# Altium PCB 20150517-F103CONTROL-dcmotor.PcbDoc
Units mil, origin at the board's own origin, x right, y up, seen from the top; angles counter-clockwise.
Board outline 5200 x 3850 mil, 2 copper layers (Top Layer, Bottom Layer); 40 components, 118 nets, 357 pads, 15 vias.
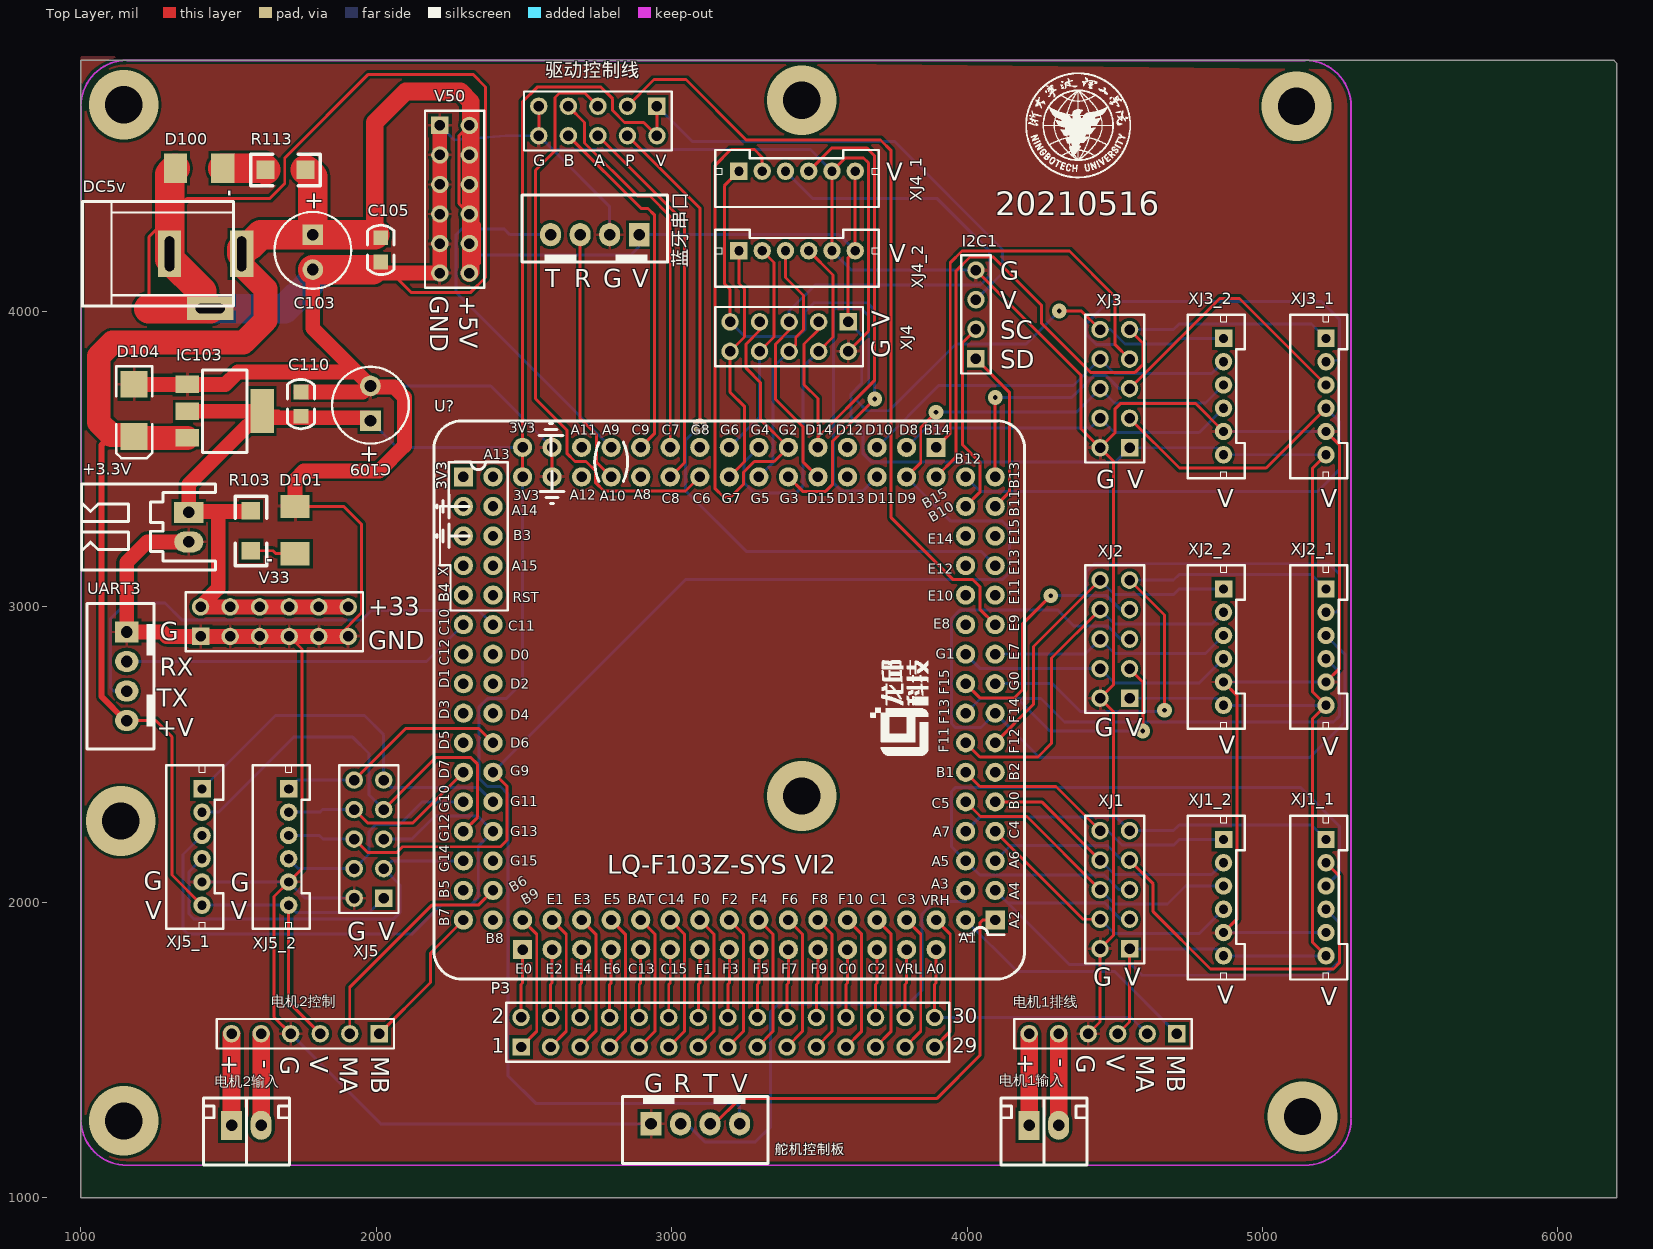
[diagram p0: Top Layer view]
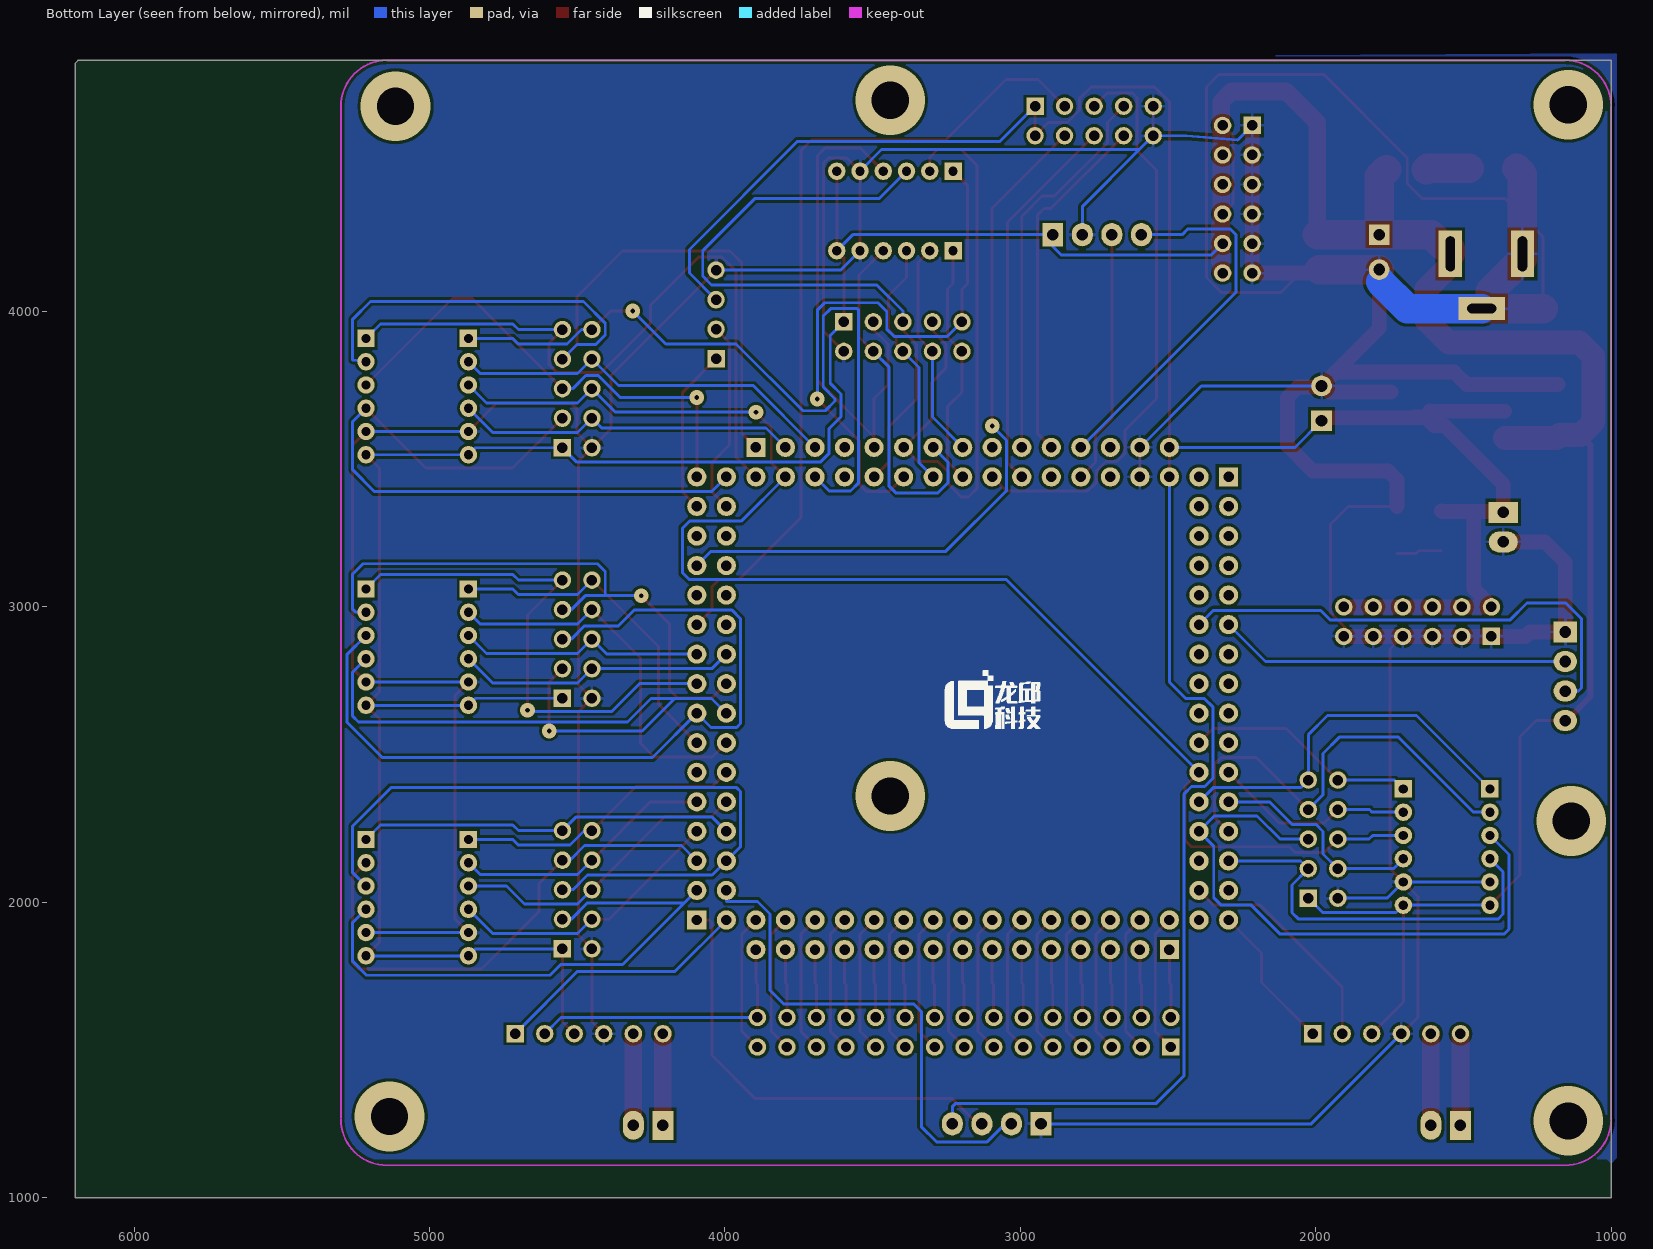
[diagram p1: Bottom Layer view, seen from below]
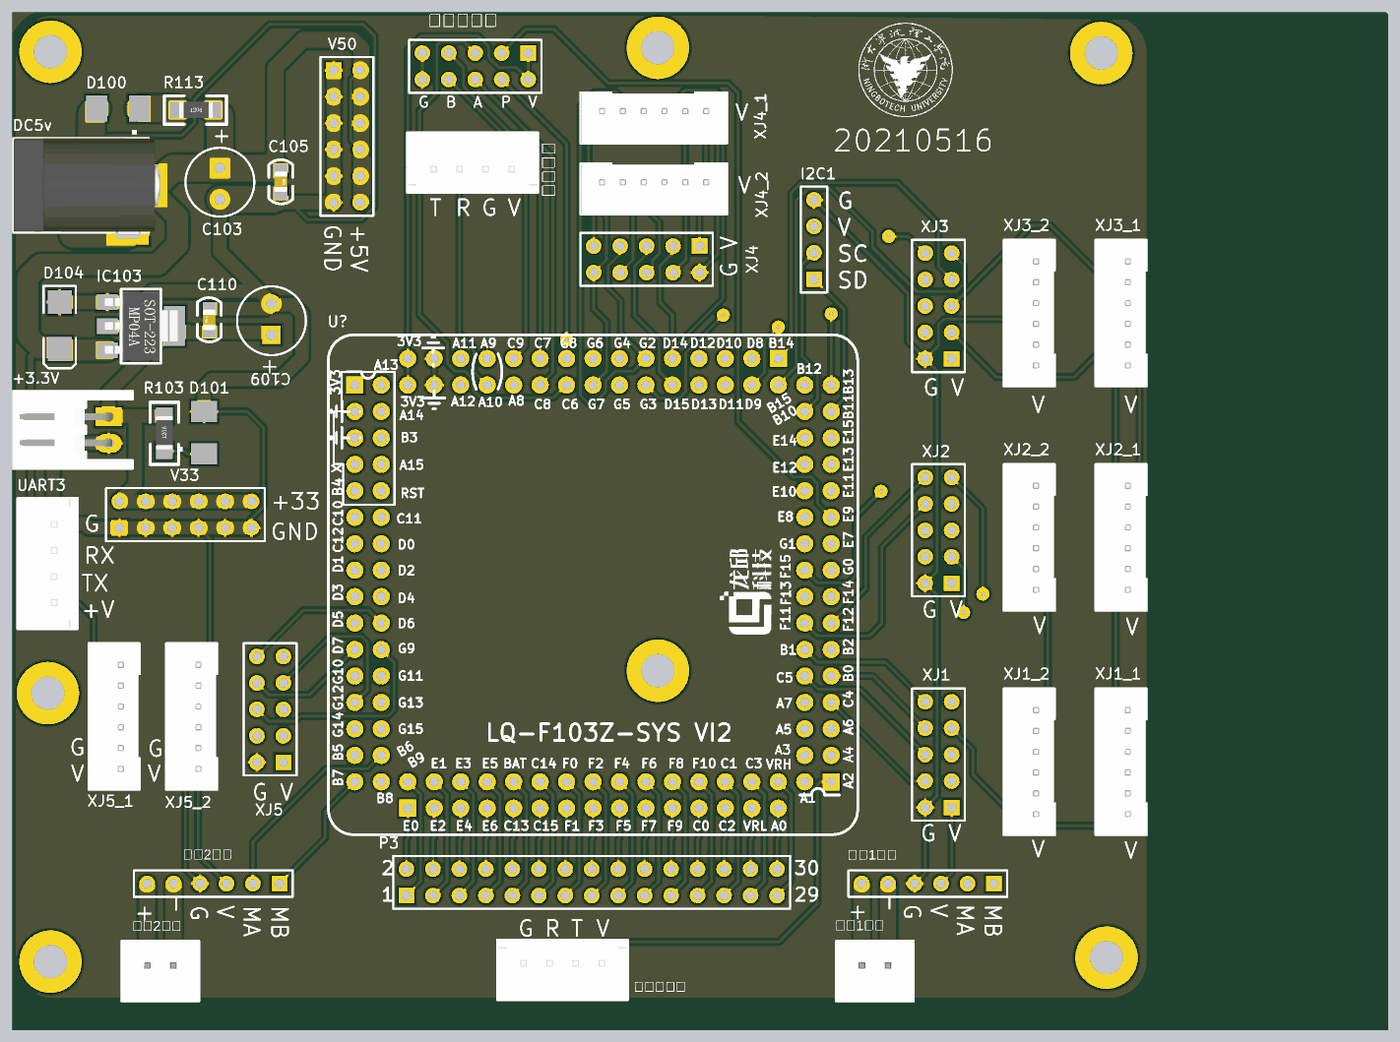
[diagram p2: 3D render of the assembled board from above, using the file's embedded part models]

## Layer stack, top to bottom
Top Solder: solder mask 0.4, Solder Resist, Dk 3.5
Top Layer: signal copper 1.4
Dielectric 1: dielectric 12.6, FR-4, Dk 4.8
Bottom Layer: signal copper 1.4
Bottom Solder: solder mask 0.4, Solder Resist, Dk 3.5

## Board outline
6200,4840 6190,4850 1000,4850 1000,1000 6200,1000

## Design rules (kind name [scope] priority, off if disabled: settings)
Clearance [All] p1: gap=10 ignorepadtopadclearanceinfootprint=FALSE except(0: Arc-Hole Track-Hole SMDPad-Hole THPad-Hole Via-Hole Fill-Hole Poly-Hole Region-Hole Text-Hole)
PolygonConnect [All] p1: connectstyle=Relief reliefconductorwidth=10 reliefentries=4 polygonreliefangle="90 Angle" airgapwidth=10
RoutingVias [All] p1: holewidth=16 width=50 viastyle="Through Hole" minholewidth=10 minwidth=30 maxholewidth=40 maxwidth=300
SolderMaskExpansion [All] p1: expansion=4 istentingtop=FALSE
Width [All] p1: maxlimit=100 minlimit=10 preferedwidth=10
30 further rules are at their usual default settings.

## Classes and differential pairs
component class 20210515-power: +3.3V C103 C105 C109 C110 D100 D101 D104 DC5v IC103 R103 R113 V33 V50
component class 20210515-F103CONTROL_dcmotor: I2C1 P3 U? UART3 XJ1 XJ1_1 XJ1_2 XJ2 XJ2_1 XJ2_2 XJ3 XJ3_1 XJ3_2 XJ4 XJ4_1 XJ4_2 XJ5 XJ5_1 XJ5_2 电机1排线 电机1输入 电机2控制 电机2输入 舵机控制板 蓝牙串口 驱动控制线

## Components (designator, comment, footprint, x,y, rotation, side; value= is the part's Value field where it differs from the comment)
+3.3V "" XH2/2.54mm/90 1365,3270 r270 top
C103 "35v/220uF" 100uF/25V 1785,4260 r90 top
C105 "0.1uF" C0805 2015,4256 r270 top
C109 "16V/10uF" 100uF/25V 1980,3630 r270 top
C110 "0.1uF" C0805 1745,3639 r90 top
D100 "LED0" "1210 LED封装" 1500,4540 r180 top
D101 "LED0" "1210 LED封装" 1780,3160 r90 top
D104 "SMBJ5.0A" SMB 1180,3665 r270 top
DC5v "DC_Socket" DC-005 1544.09,4195 r180 top
I2C1 "Header 4" HDR1X4 4030,3840 r90 top
IC103 "ASM1117-.3.v" SOT223 1490,3665 r270 top
P3 "Header 15X2" HDR2X15 2490,1510 r0 top
R103 "1K" 1206R 1575,3190 r90 top
R113 "1K" 1206R 1625,4480 r0 top
U? "LQ_F103P144_SYSVI" LQ_F103P144_SYSVI 2495,1840 r0 top
UART3 "Header 4" XH4/2.54mm/180 1145,2730 r270 top
V33 "Header 6X2" HDR2X6 1405,2900 r0 top (schematic designator P3.3V)
V50 "Header 6X2" HDR2X6 2215,4630 r270 top (schematic designator P5V)
XJ1 "Header 5X2" HDR2X5 4550,1842.54 r90 top
XJ1_1 "Header 6" PH2.0-6P 5215,2212.48 r270 top
XJ1_2 "Header 6" PH2.0-6P 4868.21,2212.48 r270 top
XJ2 "Header 5X2" HDR2X5 4550,2690.65 r90 top
XJ2_1 "Header 6" PH2.0-6P 5215,3060.59 r270 top
XJ2_2 "Header 6" PH2.0-6P 4868.21,3060.59 r270 top
XJ3 "Header 5X2" HDR2X5 4550,3538.76 r90 top
XJ3_1 "Header 6" PH2.0-6P 5215,3908.7 r270 top
XJ3_2 "Header 6" PH2.0-6P 4868.21,3908.7 r270 top
XJ4 "Header 5X2" HDR2X5 3597.46,3965 r180 top
XJ4_1 "Header 6" PH2.0-6P 3227.52,4475 r0 top
XJ4_2 "Header 6" PH2.0-6P 3227.52,4205.71 r0 top
XJ5 "Header 5X2" HDR2X5 2025,2013.76 r90 top
XJ5_1 "Header 6" PH2.0-6P 1410,2383.7 r270 top
XJ5_2 "Header 6" PH2.0-6P 1703.21,2383.7 r270 top
电机1排线 "Header 6" HDR1X6 4710,1555 r180 top (schematic designator MOTOR1)
电机1输入 "Header 2" XH2/2.54mm/180 4230,1220 r0 top (schematic designator MO1)
电机2控制 "Header 6" HDR1X6 2010,1555 r180 top (schematic designator MOTOR2)
电机2输入 "Header 2" XH2/2.54mm/180 1530,1220 r0 top (schematic designator MO2)
舵机控制板 "Header 4" XH4/2.54mm/180 3115,1240 r0 top (schematic designator SERVO)
蓝牙串口 "Header 4" XH4/2.54mm/180 2705,4270 r180 top (schematic designator BLUET)
驱动控制线 "Header 5X2" HDR2X5 2950,4695 r180 top (schematic designator P_MOTOR)

## Footprints (in the part's own frame and the unit in brackets; to place one, negate y for a bottom-side part, rotate by r counter-clockwise, add the part's x,y. Pads: shape width x height; smd on the part's side, far side on the other; paste and mask are expansions set on the pad)
100uF/25V [mil]
  rect 70x70 hole 40: 1(0,0)
  round 70 hole 40: 2(-118,0)
  silkscreen extent -183,-130 77,130
1206R [mil]
  rect 60x62.99 smd: 1(0,0) 2(135,0)
  silkscreen extent -50,-54 185,53, body extent 7,-31 133,31, height 24
"1210 LED封装" [mil]
  rect 78.74x98.43 smd: 1(20,55) 2(180,55)
C0805 [mil]
  rect 50x50 smd: 1(6,0) 2(88.7,-0.1)
  silkscreen extent -36,-45 131,45, body extent 8,-24 87,25, height 30
DC-005 [mm] "5.5X2.1mm"
  rect 2x4 hole 0.8 slot 3 at 90 deg: 1(0,0) 2(6.2,0)
  rect 4x2 hole 0.8 slot 2.5 at 0 deg: 3(2.7,4.7)
  silkscreen extent 0.72,-4.5 13.7,4.5, body extent -0.4,-4.52 13.65,4.78, height 11.2
HDR1X4 [mm] "Connector; Header; 4 Position"
  rect 1.5x1.5 hole 0.9: 1(0,0)
  round 1.5 hole 0.9: 2(2.54,0) 3(5.08,0) 4(7.62,0)
  silkscreen extent -1.27,-1.27 8.89,1.27
HDR1X6 [mm] "Connector; Header; 6 Position"
  rect 1.5x1.5 hole 0.9: 1(0,0)
  round 1.5 hole 0.9: 2(2.54,0) 3(5.08,0) 4(7.62,0) 5(10.16,0) 6(12.7,0)
  silkscreen extent -1.27,-1.27 13.97,1.27
HDR2X5 [mm] "Connector; Header; 5x2 Position"
  rect 1.5x1.5 hole 0.9: 1(0,0)
  round 1.5 hole 0.9: 2(0,2.54) 3(2.54,0) 4(2.54,2.54) 5(5.08,0) 6(5.08,2.54) 7(7.62,0) 8(7.62,2.54) 9(10.16,0) 10(10.16,2.54)
  silkscreen extent -1.27,-1.27 11.43,3.81
HDR2X6 [mm] "Connector; Header; 6x2 Position"
  rect 1.5x1.5 hole 0.9: 1(0,0)
  round 1.5 hole 0.9: 2(0,2.54) 3(2.54,0) 4(2.54,2.54) 5(5.08,0) 6(5.08,2.54) 7(7.62,0) 8(7.62,2.54) 9(10.16,0) 10(10.16,2.54) 11(12.7,0) 12(12.7,2.54)
  silkscreen extent -1.27,-1.27 13.97,3.81
HDR2X15 [mm] "Connector; Header; 15x2 Position"
  rect 1.5x1.5 hole 0.9: 1(0,0)
  round 1.5 hole 0.9: 2(0,2.54) 3(2.54,0) 4(2.54,2.54) 5(5.08,0) 6(5.08,2.54) 7(7.62,0) 8(7.62,2.54) 9(10.16,0) 10(10.16,2.54) 11(12.7,0) 12(12.7,2.54) 13(15.24,0) 14(15.24,2.54) 15(17.78,0) 16(17.78,2.54) 17(20.32,0) 18(20.32,2.54) 19(22.86,0) 20(22.86,2.54) 21(25.4,0) 22(25.4,2.54) 23(27.94,0) 24(27.94,2.54) 25(30.48,0) 26(30.48,2.54) 27(33.02,0) 28(33.02,2.54) 29(35.56,0) 30(35.56,2.54)
  silkscreen extent -1.27,-1.27 36.83,3.81
LQ_F103P144_SYSVI [mm]
  rect 1.65x1.65 hole 0.9: 1(0,0) 31(40.64,2.54) 63(35.56,43.18) 93(-5.08,40.64)
  round 1.65 hole 0.9: 2(0,2.54) 3(2.54,0) 4(2.54,2.54) 5(5.08,0) 6(5.08,2.54) 7(7.62,0) 8(7.62,2.54) 9(10.16,0) 10(10.16,2.54) 11(12.7,0) 12(12.7,2.54) 13(15.24,0) 14(15.24,2.54) 15(17.78,0) 16(17.78,2.54) 17(20.32,0) 18(20.32,2.54) 19(22.86,0) 20(22.86,2.54) 21(25.4,0) 22(25.4,2.54) 23(27.94,0) 24(27.94,2.54) 25(30.48,0) 26(30.48,2.54) 27(33.02,0) 28(33.02,2.54) 29(35.56,0) 30(35.56,2.54) 32(38.1,2.54) 33(40.64,5.08) 34(38.1,5.08) 35(40.64,7.62) 36(38.1,7.62) 37(40.64,10.16) 38(38.1,10.16) 39(40.64,12.7) 40(38.1,12.7) 41(40.64,15.24) 42(38.1,15.24) 43(40.64,17.78) 44(38.1,17.78) 45(40.64,20.32) 46(38.1,20.32) 47(40.64,22.86) 48(38.1,22.86) 49(40.64,25.4) 50(38.1,25.4) 51(40.64,27.94) 52(38.1,27.94) 53(40.64,30.48) 54(38.1,30.48) 55(40.64,33.02) 56(38.1,33.02) 57(40.64,35.56) 58(38.1,35.56) 59(40.64,38.1) 60(38.1,38.1) 61(40.64,40.64) 62(38.1,40.64) 64(35.56,40.64) 65(33.02,43.18) 66(33.02,40.64) 67(30.48,43.18) 68(30.48,40.64) 69(27.94,43.18) 70(27.94,40.64) 71(25.4,43.18) 72(25.4,40.64) 73(22.86,43.18) 74(22.86,40.64) 75(20.32,43.18) 76(20.32,40.64) 77(17.78,43.18) 78(17.78,40.64) 79(15.24,43.18) 80(15.24,40.64) 81(12.7,43.18) 82(12.7,40.64) 83(10.16,43.18) 84(10.16,40.64) 85(7.62,43.18) 86(7.62,40.64) 87(5.08,43.18) 88(5.08,40.64) 89(2.54,43.18) 90(2.54,40.64) 91(0,43.18) 92(0,40.64) 94(-2.54,40.64) 95(-5.08,38.1) 96(-2.54,38.1) 97(-5.08,35.56) 98(-2.54,35.56) 99(-5.08,33.02) 100(-2.54,33.02) 101(-5.08,30.48) 102(-2.54,30.48) 103(-5.08,27.94) 104(-2.54,27.94) 105(-5.08,25.4) 106(-2.54,25.4) 107(-5.08,22.86) 108(-2.54,22.86) 109(-5.08,20.32) 110(-2.54,20.32) 111(-5.08,17.78) 112(-2.54,17.78) 113(-5.08,15.24) 114(-2.54,15.24) 115(-5.08,12.7) 116(-2.54,12.7) 117(-5.08,10.16) 118(-2.54,10.16) 119(-5.08,7.62) 120(-2.54,7.62) 121(-5.08,5.08) 122(-2.54,5.08) 123(-5.08,2.54) 124(-2.54,2.54)
  silkscreen extent -7.62,-2.54 43.18,45.47
PH2.0-6P [mm]
  rect 1.5x1.5 hole 0.8: 1(0,0)
  round 1.5 hole 0.8: 2(2,0) 3(4,0) 4(6,0) 5(8,0) 6(10,0)
  silkscreen extent -2.03,-3.08 12.03,1.82, body extent -1.91,-2.98 11.99,1.71, height 6.01
SMB [mm]
  rect 2.3x2.3 smd: 1(-2.25,0) 2(2.25,0)
  silkscreen extent -3.8,-1.55 4.1,1.55
SOT223 [mil]
  rect 59x79 smd: 1(-88,-130) 2(2.55,-130) 3(93.1,-130)
  rect 150x79 smd: 4(1.88,123.54)
  silkscreen extent -137,-78 143,72, body extent -126,-139 130,135, height 67
XH2/2.54mm/90 [mm]
  rect 1.8x2.5 hole 1: 1(-1.27,0)
  oval 1.8x2.5 hole 1: 2(1.27,0)
  silkscreen extent -3.72,-9.2 3.68,2.3, body extent -3.72,-9.2 3.68,2.3, height 6.1
XH2/2.54mm/180 [mm]
  rect 1.8x2.5 hole 1: 1(-0.508,0.635)
  oval 1.8x2.5 hole 1: 2(2.032,0.635)
  silkscreen extent -2.94,-2.76 4.46,2.99, body extent -2.94,-2.77 4.46,2.99, height 7
XH4/2.54mm/180 [mm]
  rect 1.8x2 hole 1: 1(-4.699,0.254)
  oval 1.8x2 hole 1: 2(-2.159,0.254) 3(0.381,0.254) 4(2.921,0.254)
  silkscreen extent -7.15,-3.15 5.37,2.6, body extent -7.09,-3.05 5.31,2.7, height 7

## Part data
+3.3V: library part CON2, "Connector"
C103: library part 电解电容
C105 C110: library part 贴片电容
C109: library part 钽电容
D100 D101: "Typical INFRARED GaAs LED", LatestRevisionDate=08-Jul-2005, LatestRevisionNote="Mech Layer 1 removed.", PackageDescription="LED; 2 Leads", PackageReference=LED-0, Published=8-Jun-2000, Publisher="Altium Limited"
D104: library part 贴片稳压二极管
I2C1 UART3 舵机控制板 蓝牙串口: "Header, 4-Pin", LatestRevisionDate=17-Jul-2002, LatestRevisionNote="Re-released for DXP Platform.", Publisher="Altium Limited"
IC103: library part ASM1117
P3: "Header, 15-Pin, Dual row", LatestRevisionDate=17-Jul-2002, LatestRevisionNote="Re-released for DXP Platform.", Publisher="Altium Limited"
R103 R113: library part 贴片电阻
V33 V50: "Header, 6-Pin, Dual row", LatestRevisionDate=17-Jul-2002, LatestRevisionNote="Re-released for DXP Platform.", Publisher="Altium Limited"
XJ1 XJ2 XJ3 XJ4 XJ5 驱动控制线: "Header, 5-Pin, Dual row", LatestRevisionDate=17-Jul-2002, LatestRevisionNote="Re-released for DXP Platform.", Publisher="Altium Limited"
XJ1_1 XJ1_2 XJ2_1 XJ2_2 XJ3_1 XJ3_2 XJ4_1 XJ4_2 XJ5_1 XJ5_2 电机1排线 电机2控制: "Header, 6-Pin", LatestRevisionDate=17-Jul-2002, LatestRevisionNote="Re-released for DXP Platform.", Publisher="Altium Limited"
电机1输入 电机2输入: "Header, 2-Pin", LatestRevisionDate=17-Jul-2002, LatestRevisionNote="Re-released for DXP Platform.", Publisher="Altium Limited"

## Via types
v1: diameter 50, hole 16, Top Layer to Bottom Layer, 8 vias
v2: diameter 236.22, hole 125.98, Top Layer to Bottom Layer, 7 vias

## Nets (pads, with @x,y where several pads share a name; then routed paths per layer and width w, separated by ;. In a path a pad name is that pad's centre, name@x,y a point inside that pad or via, vN(x,y) a via of type N, cw(c..) or ccw(c..) an arc to the next point about the centre after c; other vN are vias at no path point)
+3.3V: +3.3V.1 C109.1 C110.1 I2C1.3 IC103.2 IC103.4 R103.2 U?.91 U?.92 V33.2 V33.4 V33.6 V33.8 V33.10 V33.12 舵机控制板.4 驱动控制线.1 驱动控制线.2 | length 9450.5
  Top Layer w10: IC103.4 1670,3663.12 1688.12,3645 C110.1 ; U?.92 U?.91 2495,4710 2544.53,4759.53 2760.47,4759.53 2800,4720 2800,4680 2840,4640 2905,4640 驱动控制线.2 驱动控制线.1
  Top Layer w50: IC103.2 IC103.4@1612.88,3662.45 ; R103.2 1572.5,3322.5 1460,3322.5 ; V33.12 V33.10 V33.8 V33.6 V33.4 V33.2 1405,3002.45 1465,3062.45 1465,3317.5 1460,3322.5 ; C109.1 1970,3640 1628.04,3640 1613.54,3654.5 IC103.4 IC103.4@1612.88,3662.45 ; 1460,3322.5 1367.5,3322.5 +3.3V.1 1365,3414.57 1563.54,3613.12 1599.04,3613.12 1612.88,3626.95 IC103.4@1612.88,3662.45
  Bottom Layer w10: C109.1 2070,3540 U?.91 ; U?.92 2495,2745 2440,2690 2377,2690 2347,2660 2347,2420.85 2375.85,2392 2420,2392 2445,2367 2445,1414 2541,1318 3220,1318 3230,1308 舵机控制板.4 ; 驱动控制线.1 3069,4576 3754,4576 4120,4210 4120,4130 I2C1.3
+5V: C103.1 C105.1 D104.2 DC5v.1 IC103.3 R113.2 UART3.4 V50.2 V50.4 V50.6 V50.8 V50.10 V50.12 XJ1.1 XJ1_1.6 XJ1_2.6 XJ2.1 XJ2_1.6 XJ2_2.6 XJ3.1 XJ3_1.6 XJ3_2.6 XJ4.1 XJ4_1.6 XJ4_2.6 XJ5.1 XJ5_1.6 XJ5_2.6 电机1排线.3 电机2控制.3 蓝牙串口.1 | length 14953.2
  Top Layer w10: UART3.4 1253,2615 1308,2560 1308,2092 XJ5_1.6 ; XJ5_2.6 1703.21,1661.79 电机2控制.3 ; C103.1 1895,4260 1905,4250 C105.1 ; V50.12 2320,4135 2350,4165 2350,4295 V50.8 ; V50.10 V50.8 ; V50.4 V50.6 V50.8 ; V50.2 2280,4595 2280,4365 V50.8 ; XJ4.1 3597.46,4181.94 XJ4_2.6 XJ4_1.6 ; 电机1排线.3 4550,1595 XJ1.1 ; XJ1_1.6 5170,1863.78 5170,2621.89 XJ2_1.6 5170,2711.89 5170,3470 XJ3_1.6
  Top Layer w20: 1103.31,3581.69 1070,3548.39 1070,2696.06 1151.06,2615 UART3.4
  Top Layer w60: C105.1@1995,4260 1995,4640 2100,4745 2284.85,4745 2320,4709.85 2320,4330 2320,4135 V50.12
  Top Layer w80: IC103.3 1184.52,3571.9 D104.2 1174.72,3581.69 1103.31,3581.69 1060,3625 1060,3848.14 1106.86,3895 1550,3895 1625,3970 1625,4075.98 1544.09,4156.89 DC5v.1
  Top Layer w100: DC5v.1 1544.09,4213.11 1554.72,4223.74 1572.83,4223.74 1609.09,4260 C103.1 ; R113.2 1761.42,4480 1785,4456.42 C103.1 ; C105.1@1995,4260 C103.1
  Bottom Layer w10: XJ5_1.6 XJ5_2.6 1728.21,1965 1976.24,1965 XJ5.1 ; V50.10 2353,4192 2862,4192 2890,4220 蓝牙串口.1 3566.93,4260 XJ4_2.6 ; XJ4.1 3643.28,3919.17 3643.28,3757.21 3607,3720.92 3607,3644 3647,3604 3647,3520 3677,3490 4501.24,3490 XJ3.1 4844.44,3538.76 XJ3_2.6 XJ3_1.6 ; XJ1.1 4844.44,1842.54 XJ1_2.6 XJ1_1.6 ; XJ2.1 4844.44,2690.65 XJ2_2.6 XJ2_1.6
GND: +3.3V.2 C103.2 C105.2 C109.2 C110.2 D100.2 D101.2 D104.1 DC5v.2 DC5v.3 I2C1.4 IC103.1 U?.89 U?.90 UART3.1 V33.1 V33.3 V33.5 V33.7 V33.9 V33.11 V50.1 V50.3 V50.5 V50.7 V50.9 V50.11 XJ1.2 XJ1_1.5 XJ1_2.5 XJ2.2 XJ2_1.5 XJ2_2.5 XJ3.2 XJ3_1.5 XJ3_2.5 XJ4.2 XJ4_1.5 XJ4_2.5 XJ5.2 XJ5_1.5 XJ5_2.5 电机1排线.4 电机2控制.4 舵机控制板.1 蓝牙串口.2 驱动控制线.9 驱动控制线.10 | length 23033.6
  Top Layer w10: 1229.96,4009.96 1229.96,4252.96 1360,4383 1640,4383 1690,4433 1690,4520 1973,4803 2327,4803 2370,4760 2370,4115 2320,4065 2117.2,4065 C105.2 ; 1409.06,4067.83 1423,4067.83 1423,4009.96 DC5v.3 ; 电机2控制.4 1654,1611 1654,2019.53 XJ5_2.5 1748,2113.53 1748,2857 V33.7 V33.9 1870,2900 1950,2980 1950,3280 1890,3340 D101.2 ; C109.2@1954.29,3727.7 1954.29,3748 C109.2 ; 驱动控制线.10 驱动控制线.9 ; U?.90 U?.89 ; XJ4_2.5 XJ4_1.5 3587.48,4520 3649,4520 3665.75,4503.25 3665.75,3933.29 XJ4.2 ; I2C1.4 4385,3785 4385,3603.76 XJ3.2 ; 电机1排线.4 4450,1595 XJ1.2 4495,1887.54 4495,2645.65 XJ2.2 4495,2735.65 4495,3493.76 XJ3.2 ; XJ1_2.5 4913,1942.31 4913,2700.84 XJ2_2.5 ; XJ3_2.5 4772.95,3689 4520,3689 4500,3669 4500,3588.76 XJ3.2 ; XJ2_1.5 5260,2790.63 5260,3548.74 XJ3_1.5
  Top Layer w50: D104.1 1180.29,3753.29 1359.71,3753.29 IC103.1 1488.75,3753 1530.75,3795 1925,3795 1929,3799 ; +3.3V.2 1224.29,3220 1155,3150.71 UART3.1 1275,2915 1290,2900 V33.1 V33.3 V33.5 V33.7 V33.9 V33.11 ; D101.2 1725,3430.71 1754.29,3460 2010,3460 2095,3545 2095,3710 2060.83,3744.17 1983.83,3744.17 C109.2 1929,3799 ; C110.2 C109.2@1954.29,3727.7 ; C103.2 1785,3943 1929,3799 ; 1988,4142 2000,4130 V50.11 V50.9 V50.7 V50.5 V50.3 V50.1
  Top Layer w100: 1229.96,4009.96 DC5v.3 ; D100.2 1300,4465 DC5v.2 1300,4176.89 1409.06,4067.83 ; C103.2 1988,4142
  Bottom Layer w10: XJ5_1.5 XJ5_2.5 1758.18,2013.76 XJ5.2 ; 电机2控制.4 2015,1250 舵机控制板.1 ; 1780,4100 1785,4100 C103.2 ; C109.2 2387,3748 U?.89 ; V50.1 2264,4581 2439,4595 驱动控制线.10 2597,4548 ; 蓝牙串口.2 2790,4355 2597,4548 ; XJ4_2.5 3608.19,4140 I2C1.4 ; XJ4_1.5 3469.48,4548 2597,4548 ; XJ1_2.5 XJ1_1.5 ; XJ2_2.5 XJ2_1.5 ; XJ3_2.5 XJ3_1.5
  Bottom Layer w100: DC5v.3 1689.96,4009.96 1780,4100
INA1: U?.80 驱动控制线.5 | length 1991.6
  Top Layer w10: 驱动控制线.5 2705.47,4739.53 2620,4739.53 2605,4724.53 2605,4544 2539,4478 2539,3705 2645,3599 2645,3520 2673,3492 2710.15,3492 2742.48,3459.67 2742.48,3420 2770.48,3392 3047,3392 U?.80
INA2: U?.82 驱动控制线.6 | length 1296.2
  Top Layer w10: 驱动控制线.6 3043,4302 3043,3488 U?.82
INB1: U?.81 驱动控制线.7 | length 1322
  Top Layer w10: 驱动控制线.7 2705,4640 2705,4570.51 2884.92,4390.59 2926.12,4390.59 2995,4321.71 U?.81
INB2: U?.83 驱动控制线.8 | length 1208.4
  Top Layer w10: 驱动控制线.8 2896.48,4348.52 2920,4348.52 2941,4327.52 2941,3586 U?.83
M1+: 电机1排线.6 电机1输入.1 | length 310
  Top Layer w60: 电机1输入.1 电机1排线.6
M1-: 电机1排线.5 电机1输入.2 | length 310
  Top Layer w60: 电机1输入.2 电机1排线.5
M1_A: P3.30 U?.29 电机1排线.2 | length 974.9
  Top Layer w10: P3.30 3890,1722 3895,1727 U?.29
  Bottom Layer w10: P3.30 4555,1610 电机1排线.2
M1_B: U?.32 电机1排线.1 | length 874.5
  Bottom Layer w10: U?.32 4168.83,1766.17 4498.83,1766.17 电机1排线.1
M2+: 电机2控制.6 电机2输入.1 | length 310
  Top Layer w60: 电机2输入.1 电机2控制.6
M2-: 电机2控制.5 电机2输入.2 | length 310
  Top Layer w60: 电机2输入.2 电机2控制.5
M2_A: U?.122 电机2控制.2 | length 777.9
  Top Layer w10: 电机2控制.2 1910,1712 2188,1990 2345,1990 U?.122
M2_B: U?.123 电机2控制.1 | length 503.1
  Top Layer w10: 电机2控制.1 2183,1728 2183,1828 U?.123
NetD100_1: D100.1 R113.1 | length 147.1
  Top Layer w100: D100.1 1620,4485 R113.1
NetD101_1: D101.1 R103.1 | length 154.1
  Top Layer w10: R103.1 1650,3190 1660,3180 D101.1
PA2: U?.31 舵机控制板.3 | length 1513.8
  Top Layer w10: 舵机控制板.3 3145,1250 3230,1335 3897,1335 4043,1481 4043,1930 4053,1940 U?.31
PA3: U?.34 舵机控制板.2 | length 1744
  Bottom Layer w10: 舵机控制板.2 3051,1250 3112,1189 3284,1189 3335,1240 3335,1630 3360,1655 3800,1655 3847,1702 3847,1960 3890,2003 3995,2003 U?.34
PA4: U?.33 XJ1.3 XJ1_1.4 | length 1934.2
  Bottom Layer w10: U?.33 4137,1998 ; XJ1.3 4520.46,1942.54 4465,1998 4137,1998 ; XJ1_1.4 5260,1931.26 5260,1800 5213,1753 4592,1753 4556,1789 4346,1789 4137,1998
PA5: U?.36 XJ1.5 XJ1_1.3 | length 2444.1
  Bottom Layer w10: XJ1.5 4514.46,2042.54 4465,2092 4043,2092 U?.36 3947,2188 3947,2375 3960,2388 5130,2388 5260,2258 5260,2100 XJ1_1.3
PA6: U?.35 XJ1.7 XJ1_1.2 | length 1781.7
  Top Layer w10: XJ1.7 4630,2062.54 4630,1968 4824,1774 5240,1774 5260,1794 5260,2088.74 XJ1_1.2
  Bottom Layer w10: U?.35 4147,2192 4475,2192 4524.46,2142.54 XJ1.7
PA7: U?.38 XJ1.9 XJ1_1.1 | length 1287.3
  Bottom Layer w10: U?.38 4043,2288 4504.54,2288 XJ1.9 4699,2242.54 4718.46,2262 5165.48,2262 XJ1_1.1
PA8: U?.84
PA9: U?.85 蓝牙串口.4 | length 1274
  Bottom Layer w10: 蓝牙串口.4 2452,4260 2432,4280 2290,4280 2270,4260 2270,4065 U?.85
PA10: U?.86 蓝牙串口.3 | length 863.5
  Top Layer w10: 蓝牙串口.3 2690,3638 2745,3583 2745,3490 U?.86
PA11: U?.87
PA12: U?.88
PB0: U?.39 XJ1.8 XJ1_2.2 | length 891.6
  Top Layer w10: U?.39 4252.54,2340 XJ1.8
  Bottom Layer w10: XJ1.8 4498.54,2094 4828.47,2094 XJ1_2.2
PB1: U?.42 XJ1.10 XJ1_2.1 | length 982.8
  Top Layer w10: U?.42 4043,2392 4300.54,2392 XJ1.10
  Bottom Layer w10: XJ1.10 4475.46,2242.54 4524,2194 4699.52,2194 4718,2212.48 XJ1_2.1
PB2: U?.41
PB5: U?.121
PB8: U?.124
PB9: P3.1 U?.2 | length 471.8
  Top Layer w10: P3.1 2543,1563 2543,1892 U?.2
PB10: I2C1.2 U?.60 | length 662.5
  Top Layer w10: U?.60 4043,3388 4043,3490 3985,3548 3985,3895 I2C1.2
PB11: I2C1.1 U?.59 | length 566.7
  Top Layer w10: I2C1.1 4143,3727 4143,3388 U?.59
PB12: U?.62 XJ3.3 XJ3_1.4 | length 2362.3
  Top Layer w10: XJ3.3 4718.76,3470 5012.52,3470 XJ3_1.4
  Bottom Layer w10: U?.62 4045,3390 5186,3390 5260,3464 5260,3627.48 XJ3_1.4
PB13: U?.61 XJ3.5 XJ3_1.3 | length 1685.9
  Top Layer w10: U?.61 v1(4095,3709) ; XJ3.5 4855.24,4044 4922.22,4044 XJ3_1.3
  Bottom Layer w10: v1(4095,3709) 4354.47,3709 4428.76,3783.29 4470.71,3783.29 4515.24,3738.76 XJ3.5
PB14: U?.63 XJ3.7 XJ3_1.2 | length 2827.4
  Top Layer w10: U?.63 3943,3588 3943,4165 3982.53,4204.53 4346.47,4204.53 4500,4051 4500,3888.76 XJ3.7
  Bottom Layer w10: XJ3.7 4500.76,3888 4437,3888 4405,3920 4405,3960 4479,4034 5200,4034 5260,3974 5260,3835.96 XJ3_1.2
PB15: U?.64 XJ3.9 XJ3_1.1 | length 2416.8
  Top Layer w10: U?.64 3963,3508 3963,4138 4009.53,4184.53 4088.47,4184.53 4251.51,4021.49 4251.51,3960 4417.51,3794 4569,3794 4595,3820 4595,3893.76 XJ3.9
  Bottom Layer w10: XJ3.9 4698.76,3938.76 4718,3958 5165.7,3958 XJ3_1.1
PC0: P3.24 U?.23 | length 232.1
  Top Layer w10: P3.24 3590,1722 3595,1727 U?.23
PC1: P3.25 U?.26 | length 471.8
  Top Layer w10: P3.25 3743,1563 3743,1892 U?.26
PC2: P3.26 U?.25 | length 232.1
  Top Layer w10: P3.26 3690,1722 3695,1727 U?.25
PC3: P3.27 U?.28 | length 471.8
  Top Layer w10: P3.27 3843,1563 3843,1892 U?.28
PC4: U?.37 XJ1.4 XJ1_2.4 | length 950.6
  Top Layer w10: U?.37 4392.46,1942.54 XJ1.4
  Bottom Layer w10: XJ1.4 4498.54,1894 4785.95,1894 XJ1_2.4
PC5: U?.40 XJ1.6 XJ1_2.3 | length 1041.8
  Top Layer w10: U?.40 4045,2290 4202.54,2290 XJ1.6
  Bottom Layer w10: XJ1.6 4498.54,1994 4678,1994 4739,2055 XJ1_2.3
PC10: U?.103 UART3.2 | length 1191.8
  Bottom Layer w10: UART3.2 2170,2815 U?.103
PC11: U?.104 UART3.3 | length 1668.7
  Bottom Layer w10: UART3.3 1110,2715 1100,2725 1100,2960 1153,3013 1285,3013 1343,2955 1950,2955 1983,2988 2347,2988 U?.104
PC12: U?.105
PC13: P3.10 U?.9 | length 232.1
  Top Layer w10: P3.10 2890,1722 2895,1727 U?.9
PC14: P3.11 U?.12 | length 471.8
  Top Layer w10: P3.11 3043,1563 3043,1892 U?.12
PC15: P3.12 U?.11 | length 232.1
  Top Layer w10: P3.12 2990,1722 2995,1727 U?.11
PD0: U?.106
PD1: U?.107
PD2: U?.108
PD3: U?.109
PD4: U?.110
PD5: U?.111
PD6: U?.112 XJ5.10 XJ5_2.1 | length 796.3
  Top Layer w10: XJ5.10 2099.24,2588 2347,2588 U?.112
  Bottom Layer w10: XJ5_2.1 1733.27,2413.76 XJ5.10
PD7: U?.113 XJ5.8 XJ5_2.2 | length 684.8
  Top Layer w10: XJ5.8 1969.76,2269 2124,2269 U?.113
  Bottom Layer w10: XJ5_2.2 1809,2304.96 1817.8,2313.76 XJ5.8
PD8: U?.65 XJ3.4 XJ3_2.4 | length 1168.5
  Bottom Layer w10: U?.65 3861.03,3606.03 4417.26,3606.03 XJ3.4 4498.76,3590 4785.73,3590 XJ3_2.4
PD9: U?.66 U?.114 XJ3.6 XJ3_2.3 XJ5.6 XJ5_2.3 | length 4941.3
  Top Layer w10: XJ5.6 1969.76,2169 2070,2169 2089,2188 2420,2188 2443,2211 2443,2392 U?.114 ; U?.66 3843,3488 3843,3607 v1(3895,3659)
  Bottom Layer w10: XJ5_2.3 1807,2226.22 1819.46,2213.76 XJ5.6 ; U?.114 3047,3092 4120,3092 4143,3115 4143,3267 4120,3290 3945,3290 U?.66 ; v1(3895,3659) 4370.24,3659 XJ3.6 4498.76,3690 4806.99,3690 XJ3_2.3
PD10: U?.67 XJ3.8 XJ3_2.2 | length 1333.7
  Bottom Layer w10: U?.67 3904.03,3749.03 4360.27,3749.03 XJ3.8 4498.76,3790 4828.25,3790 XJ3_2.2
PD11: U?.68 XJ3.10 XJ3_2.1 | length 2649.6
  Top Layer w10: v1(4312,4002) 4386.76,4002 XJ3.10
  Bottom Layer w10: U?.68 3647,3392 3575,3392 3547,3420 3547,4004.53 3552,4009.53 3642,4009.53 3667,3984.53 3667,3744 3627,3704 3627,3697 3660,3664 3736,3664 3962,3890 4200,3890 v1(4312,4002) ; XJ3.10 4485.47,3938.76 4534.24,3890 4699.3,3890 4718,3908.7 XJ3_2.1
PD12: U?.69
PD13: U?.70
PD14: U?.71 XJ4.3 XJ4_1.4 | length 1762.6
  Top Layer w10: XJ4_1.4 3542.74,4554 3660,4554 3685.75,4528.25 3685.75,3765.71 3495,3574.96 ; U?.71 3495,3574.96 ; XJ4.3 3497.46,3939.46 3448,3890 3448,3752.36 3495,3705.36 3495,3574.96
PD15: U?.72 XJ4.5 XJ4_1.3 | length 2253.8
  Top Layer w10: XJ4.5 3397.46,3935.46 3352,3890 3352,3702 3445,3609 3445,3490 U?.72
  Bottom Layer w10: XJ4_1.3 3478,4382 3899,4382 4075,4206 4075,4120 4045,4090 3485.57,4090 3397.46,4001.89 XJ4.5
PE0: P3.2 U?.1 | length 232.1
  Top Layer w10: P3.2 2490,1722 2495,1727 U?.1
PE1: P3.3 U?.4 | length 471.8
  Top Layer w10: P3.3 2643,1563 2643,1892 U?.4
PE2: P3.4 U?.3 | length 232.1
  Top Layer w10: P3.4 2590,1722 2595,1727 U?.3
PE3: P3.5 U?.6 | length 471.8
  Top Layer w10: P3.5 2743,1563 2743,1892 U?.6
PE4: P3.6 U?.5 | length 232.1
  Top Layer w10: P3.6 2690,1722 2695,1727 U?.5
PE5: P3.7 U?.8 | length 471.8
  Top Layer w10: P3.7 2843,1563 2843,1892 U?.8
PE6: P3.8 U?.7 | length 232.1
  Top Layer w10: P3.8 2790,1722 2795,1727 U?.7
PE7: U?.49 XJ2.6 XJ2_2.3 | length 839.7
  Bottom Layer w10: U?.49 4399.35,2840 XJ2.6 4498.65,2842 4807.1,2842 XJ2_2.3
PE8: U?.52
PE9: U?.51 驱动控制线.3 | length 2819.5
  Top Layer w10: 驱动控制线.3 2940,4785 3048,4785 3252,4581 3706.57,4581 3743,4544.57 3743,3302 3953,3092 4020,3092 4043,3069 4043,2992 U?.51
PE10: U?.54
PE11: U?.53
PE12: U?.56
PE13: U?.55 驱动控制线.4 | length 2476.2
  Top Layer w10: 驱动控制线.4 3095,4350 v1(3095,3612)
  Bottom Layer w10: v1(3095,3612) 3047,3564 3047,3393 3252,3188 4047,3188 U?.55
PE14: U?.58
PE15: U?.57
PF0: P3.13 U?.14 | length 471.8
  Top Layer w10: P3.13 3143,1563 3143,1892 U?.14
PF1: P3.14 U?.13 | length 232.1
  Top Layer w10: P3.14 3090,1722 3095,1727 U?.13
PF2: P3.15 U?.16 | length 471.8
  Top Layer w10: P3.15 3243,1563 3243,1892 U?.16
PF3: P3.16 U?.15 | length 232.1
  Top Layer w10: P3.16 3190,1722 3195,1727 U?.15
PF4: P3.17 U?.18 | length 471.8
  Top Layer w10: P3.17 3343,1563 3343,1892 U?.18
PF5: P3.18 U?.17 | length 232.1
  Top Layer w10: P3.18 3290,1722 3295,1727 U?.17
PF6: P3.19 U?.20 | length 471.8
  Top Layer w10: P3.19 3443,1563 3443,1892 U?.20
PF7: P3.20 U?.19 | length 232.1
  Top Layer w10: P3.20 3390,1722 3395,1727 U?.19
PF8: P3.21 U?.22 | length 471.8
  Top Layer w10: P3.21 3543,1563 3543,1892 U?.22
PF9: P3.22 U?.21 | length 232.1
  Top Layer w10: P3.22 3490,1722 3495,1727 U?.21
PF10: P3.23 U?.24 | length 471.8
  Top Layer w10: P3.23 3643,1563 3643,1892 U?.24
PF11: U?.44 XJ2.8 XJ2_2.2 | length 1305.4
  Top Layer w10: U?.44 4043,2492 4240,2492 4286,2538 4286,2826.65 XJ2.8
  Bottom Layer w10: XJ2.8 4498.65,2942 4828.36,2942 XJ2_2.2
PF12: U?.43 XJ2.10 XJ2_2.1 | length 1143.8
  Top Layer w10: U?.43 4225,2670 4225,2865.65 XJ2.10
  Bottom Layer w10: XJ2.10 4498.65,3042 4699.41,3042 4718,3060.59 XJ2_2.1
PF13: U?.46 XJ2.3 XJ2_1.4 | length 2240
  Top Layer w10: XJ2.3 4595,2745.65 v1(4595,2580)
  Bottom Layer w10: U?.46 4045,2690 4170,2690 ; v1(4595,2580) 4280,2580 4170,2690 ; XJ2_1.4 5260,2779.37 5260,2630 5240,2610 4330,2610 4250,2690 4170,2690
PF14: U?.45 XJ2.5 XJ2_1.3 | length 2801.7
  Bottom Layer w10: XJ2.5 4520.35,2890.65 4475,2936 4360,2936 4306,2990 3977,2990 3947,2960 3947,2605 3960,2592 4047,2592 U?.45 4245,2490 5160,2490 5280,2610 5280,2838.11 XJ2_1.3
PF15: U?.48 XJ2.7 XJ2_1.2 | length 1999
  Top Layer w10: U?.48 4043,2692 4160,2692 4188,2720 4188,2943 v1(4283,3038)
  Bottom Layer w10: v1(4283,3038) 4405,3038 ; XJ2.7 4520,2990.65 4472.65,3038 4405,3038 ; XJ2_1.2 5250,2981.85 5260,2991.85 5260,3111 5225,3146 4431,3146 4405,3120 4405,3038
PG0: U?.47 XJ2.9 XJ2_1.1 | length 1796.6
  Top Layer w10: XJ2.9 4668,2972.65 v1(4668,2650)
  Bottom Layer w10: U?.47 4289,2740 4383,2646 4664,2646 v1(4668,2650) ; XJ2.9 4698.65,3090.65 4718,3110 5165.59,3110 XJ2_1.1
PG1: U?.50 XJ2.4 XJ2_2.4 | length 947.9
  Bottom Layer w10: U?.50 4044.35,2790.65 XJ2.4 4498.65,2742 4785.84,2742 XJ2_2.4
PG2: U?.73 XJ4.7 XJ4_1.2 | length 2189.8
  Top Layer w10: XJ4.7 3297.46,3935.46 3252,3890 3252,3808 3300,3760 3300,3635 U?.73 3347,3492 3279.48,3492 3242.48,3455 3242.48,3414.48 3200,3372 3175,3372 3147,3400 3147,4495 3200,4548 3280,4548 3306.26,4521.74 XJ4_1.2
PG3: U?.74 XJ4.9 XJ4_1.1 | length 1971.2
  Top Layer w10: XJ4.9 3197.46,4075 3178,4094.46 3178,4425.48 XJ4_1.1 ; U?.74 3445,3390 3520,3390 3545,3415 3545,3562 v1(3687,3704)
  Bottom Layer w10: XJ4.9 3247.46,3915 3427,3915 3452,3940 3452,4000 3481.53,4029.53 3661.98,4029.53 3687,4004.51 v1(3687,3704)
PG4: U?.75 XJ4.4 XJ4_2.4 | length 1237.2
  Top Layer w10: XJ4_2.4 3546,4123.45 3546,3913.54 XJ4.4
  Bottom Layer w10: U?.75 3245,3490 3245,3420 3280,3385 3420,3385 3445,3410 3445,3812.54 XJ4.4
PG5: U?.76 XJ4.6 XJ4_2.3 | length 853.5
  Top Layer w10: XJ4_2.3 3385,4115 3446,4054 3446,3938.54 3419.86,3912.41 3419.86,3887.41 XJ4.6
  Bottom Layer w10: U?.76 3343,3488 3343,3810.54 XJ4.6
PG6: U?.77 XJ4.8 XJ4_2.2 | length 744.7
  Top Layer w10: XJ4.8 3346,3913.54 3346,4165.97 XJ4_2.2
  Bottom Layer w10: U?.77 3297.46,3642.46 XJ4.8
PG7: U?.78 XJ4.10 XJ4_2.1 | length 835.5
  Top Layer w10: U?.78 3247,3492 3247,3677.46 3197.46,3727 XJ4.10 3246,3913.54 3246,4076 3227.52,4094.48 XJ4_2.1
PG8: U?.79
PG10: U?.115 XJ5.4 XJ5_2.4 | length 744.1
  Bottom Layer w10: XJ5_2.4 1736.92,2113.76 XJ5.4 1975,2163.76 1975,2240 1999,2264 2080,2264 2156,2340 U?.115
PG11: U?.116 XJ5.9 XJ5_1.1 | length 1298.6
  Bottom Layer w10: XJ5_1.1 1658.3,2632 1960,2632 2025,2567 XJ5.9 2050.76,2388 2347,2388 U?.116
PG12: U?.117 XJ5.7 XJ5_1.2 | length 1551.4
  Top Layer w10: XJ5.7 2201.24,2490 2320,2490 2343,2467 2343,2288 U?.117
  Bottom Layer w10: XJ5_1.2 1465.96,2304.96 1720,2559 1920,2559 1975,2504 1975,2363.76 XJ5.7
PG13: U?.118 XJ5.5 XJ5_1.3 | length 2071.2
  Bottom Layer w10: XJ5_1.3 1345.47,2161.69 1345.47,1908.94 1362.41,1892 2120,1892 2218,1990 2320,1990 2345,2015 2345,2190 U?.118 2343,2292 2198.24,2292 2120,2213.76 XJ5.5
PG14: U?.119 XJ5.3 XJ5_1.4 | length 1388.3
  Bottom Layer w10: XJ5_1.4 1365.47,2102.95 1365.47,1960 1381.47,1944 2059.24,1944 2080,1964.76 2080,2058.76 XJ5.3 2051.24,2140 U?.119
PG15: U?.120
VBAT: P3.9 U?.10 | length 471.8
  Top Layer w10: P3.9 2943,1563 2943,1892 U?.10
VRH: P3.29 U?.30 | length 471.8
  Top Layer w10: P3.29 3943,1563 3943,1892 U?.30
VRL: P3.28 U?.27 | length 232.1
  Top Layer w10: P3.28 3790,1722 3795,1727 U?.27
pads on no net: U?.93 U?.94 U?.95 U?.96 U?.97 U?.98 U?.99 U?.100 U?.101 U?.102
copper on no net:
  other v2: 1145,1260 5135,1275 1135,2275 3440,2360 5115,4695 1145,4700 3440,4715

## Polygon pours and split planes (outlines as drawn)
GND on Top Layer "GND_L01_P000" (solid, pour order 0): 995,4865 1000,4860 1000,1115 5300,1115 5310,1125 5290,1145 5290,4820
GND on Bottom Layer "GND_L02_P001" (solid, pour order 1): 980,4875 980,1135 1000,1115 1015,1130 5290,1130 5290,4820 5260,4850

## Keep-outs
Keep-Out Layer:
  lines w6: 999.68,1265 ccw(c1155,1265) 1155,1109.68 ; 999.68,4695 cw(c1155,4695) 1155,4850.32 ; 1000,1265 1000,4695 ; 1155,1110 5144.68,1110 ; 1155,4850 5144.68,4850 ; 5144.68,1109.68 ccw(c5144.68,1265) 5300,1265 ; 5144.68,4850.32 cw(c5144.68,4695) 5300,4695 5300,1270

## Silkscreen, mask and mechanical layers (free items; w line width, h text height)
Top Overlay:
  drawing of 3748 lines, arcs and shapes, not listed
  text "G" at 2531,4491 h40
  text "B" at 2634.75,4491 h40
  text "A" at 2738.5,4491 h40
  text "P" at 2842.25,4491 h40
  text "V" at 2946,4491 h40
  text "V" at 3727,4442 h60
  text "20210516" at 4096,4326 h80
  text "V" at 3737,4167 h60
  text "G" at 4113,4108 h60
  text "T" at 2572,4082 h60
  text "R" at 2670.33,4082 h60
  text "G" at 2768.67,4082 h60
  text "V" at 2867,4082 h60
  text "GND" at 2182,4053 h60 r270
  text "+5V" at 2282,4053 h60 r270
  text "V" at 4113,4008 h60
  text "V" at 3738,3947 h60 r90
  text "SC" at 4113,3908 h60
  text "G" at 3738,3842 h60 r90
  text "SD" at 4113,3808 h60
  text "G" at 4437,3402 h60
  text "V" at 4542,3402 h60
  text "V" at 4847,3337 h60
  text "V" at 5197,3337 h60
  text "+33" at 1972,2972 h60
  text "G" at 1267,2887 h60
  text "GND" at 1972,2857 h60
  text "RX" at 1267,2767 h60
  text "TX" at 1257,2662 h60
  text "+V" at 1257,2562 h60
  text "G" at 4432,2562 h60
  text "V" at 4537,2562 h60
  text "V" at 4852,2502 h60
  text "V" at 5202,2497 h60
  text "G" at 1212,2042 h60
  text "G" at 1507,2037 h60
  text "V" at 1217,1942 h60
  text "V" at 1507,1942 h60
  text "G" at 1902,1872 h60
  text "V" at 2007,1872 h60
  text "G" at 4427,1717 h60
  text "V" at 4532,1717 h60
  text "V" at 4847,1657 h60
  text "V" at 5197,1652 h60
  text "+" at 4172,1488 h60 r270
  text "+" at 1477,1483 h60 r270
  text "G" at 4372,1483 h60 r270
  text "V" at 4472,1483 h60 r270
  text "MA" at 4572,1483 h60 r270
  text "MB" at 4677,1483 h60 r270
  text "G" at 1677,1478 h60 r270
  text "V" at 1777,1478 h60 r270
  text "MA" at 1877,1478 h60 r270
  text "MB" at 1982,1478 h60 r270
  text "-" at 4337.99,1442 h60 r90
  text "-" at 1642.99,1437 h60 r90
  text "G" at 2907,1357 h60
  text "R" at 3007,1357 h60
  text "T" at 3107,1357 h60
  text "V" at 3202,1357 h60

## Text inside footprints (layer, text, board x,y; h text height)
C103: Top Overlay "+" at 1815,4340 h59.06 r90
C109: Top Overlay "+" at 1950,3550 h59.06 r270
D100: Top Overlay "·" at 1415,4425 h200 r270
D101: Top Overlay "·" at 1665,3245 h200 r180
P3: Top Overlay "1" at 2390,1490 h50; Top Overlay "2" at 2390,1590 h50; Top Overlay "29" at 3950,1490 h50; Top Overlay "30" at 3950,1590 h50
U?: Top Overlay "3V3" at 2463,3361 h33.46; Top Overlay "C14" at 2955,1993.34 h33.46; Top Overlay "E3" at 2669,1993.34 h33.46; Top Overlay "B4" at 2247.69,3015 h35.43 r90; Top Overlay "C12" at 2247.69,2801 h33.47 r90; Top Overlay "F7" at 3370,1757.39 h33.46; Top Overlay "G4" at 3268,3582.54 h33.46; Top Overlay "B3" at 2463,3226 h33.46; Top Overlay "G12" at 2247.69,2205 h33.46 r90; Top Overlay "3V3" at 2239,3397 h35.43 r90; Top Overlay "E1" at 2577,1993.34 h33.46; Top Overlay "B6" at 2462,2032 h33.46 r30; Top Overlay "A4" at 4175.94,2009 h33.46 r90; Top Overlay "B2" at 4175.94,2412 h33.46 r90; Top Overlay "A5" at 3881,2122 h33.46; Top Overlay "A1" at 3973,1863 h33.46; Top Overlay "F14" at 4175.94,2606 h33.46 r90; Top Overlay "B0" at 4175.94,2313 h33.46 r90; Top Overlay "C5" at 3881,2318 h33.46; Top Overlay "F12" at 4175.94,2503 h33.46 r90; Top Overlay "C4" at 4175.94,2215 h33.46 r90; Top Overlay "G0" at 4175.94,2716 h33.46 r90; Top Overlay "A7" at 3883,2221 h33.46; Top Overlay "F13" at 3940,2602 h33.46 r90; Top Overlay "B1" at 3895,2423 h33.46; Top Overlay "E8" at 3886,2926 h33.46; Top Overlay "G1" at 3893,2824 h33.46; Top Overlay "F15" at 3939,2703 h33.46 r90; Top Overlay "F11" at 3938,2507 h33.46 r90; Top Overlay "E7" at 4175.94,2819 h33.46 r90; Top Overlay "E9" at 4175.94,2916 h33.46 r90; Top Overlay "E11" at 4175.94,3008 h33.46 r90; Top Overlay "E10" at 3866,3021 h33.46; Top Overlay "E15" at 4175.94,3211 h33.46 r90; Top Overlay "E13" at 4175.94,3107 h33.46 r90; Top Overlay "E12" at 3867.17,3112 h33.46; Top Overlay "B10" at 3882,3285 h33.47 r30; Top Overlay "B12" at 3958,3485 h33.46; Top Overlay "E14" at 3867.17,3214 h33.46; Top Overlay "B11" at 4175.94,3305 h33.47 r90; Top Overlay "B13" at 4175.94,3400 h33.47 r90; Top Overlay "3V3" at 2450,3589 h33.46; Top Overlay "RST" at 2462,3015 h33.46; Top Overlay "D1" at 2247.69,2725 h33.46 r90; Top Overlay "D3" at 2247.69,2619 h33.46 r90; Top Overlay "D5" at 2247.69,2517 h33.46 r90; Top Overlay "D7" at 2247.69,2418 h33.46 r90; Top Overlay "G10" at 2247.69,2303 h33.46 r90; Top Overlay "G14" at 2247.69,2102 h33.46 r90; Top Overlay "B5" at 2247.69,2014 h33.46 r90; Top Overlay "B7" at 2247.69,1918 h33.46 r90; Top Overlay "B9" at 2503,1990 h33.46 r30; Top Overlay "B8" at 2371,1862 h33.46; Top Overlay "A14" at 2459,3310 h33.46; Top Overlay "A13" at 2363,3500 h33.47; Top Overlay "D0" at 2452.54,2821 h33.46; Top Overlay "D2" at 2452.54,2723 h33.46; Top Overlay "D4" at 2452.54,2618 h33.46; Top Overlay "D6" at 2452.54,2523 h33.46; Top Overlay "G9" at 2452.54,2428 h33.46; Top Overlay "G11" at 2452.54,2325 h33.46; Top Overlay "G13" at 2452.54,2223 h33.46; Top Overlay "G15" at 2452.54,2124 h33.46; Top Overlay "A6" at 4175.94,2113 h33.46 r90; Top Overlay "C1" at 3671,1993.34 h33.46; Top Overlay "F10" at 3564,1993.34 h33.46; Top Overlay "F8" at 3474,1993.34 h33.46; Top Overlay "F6" at 3372,1993.34 h33.46; Top Overlay "A3" at 3878,2045 h33.46; Top Overlay "F5" at 3275,1757.39 h33.46; Top Overlay "F3" at 3171,1757.39 h33.46; Top Overlay "F1" at 3081,1757 h33.46; Top Overlay "C15" at 2963,1757.39 h33.46; Top Overlay "E4" at 2672,1757.39 h33.46; Top Overlay "E2" at 2573,1757.39 h33.46; Top Overlay "C13" at 2852,1757.39 h33.46; Top Overlay "VRH" at 3844,1990 h33.46; Top Overlay "C3" at 3765,1993.34 h33.46; Top Overlay "C2" at 3664,1757.39 h33.46; Top Overlay "C0" at 3566,1757.39 h33.46; Top Overlay "F9" at 3470,1757.39 h33.46; Top Overlay "F4" at 3269,1993.34 h33.46; Top Overlay "F2" at 3170,1993.34 h33.46; Top Overlay "F0" at 3073,1993.34 h33.46; Top Overlay "E5" at 2770,1993.34 h33.46; Top Overlay "B14" at 3853,3582.54 h33.46; Top Overlay "D8" at 3770,3582.54 h33.46; Top Overlay "D12" at 3556,3583 h33.46; Top Overlay "D14" at 3452,3582.54 h33.46; Top Overlay "G2" at 3363,3582.54 h33.46; Top Overlay "G6" at 3165,3582.54 h33.46; Top Overlay "G8" at 3065,3582.54 h33.46; Top Overlay "C7" at 2967,3582.54 h33.46; Top Overlay "C9" at 2865,3582.54 h33.46; Top Overlay "A9" at 2765,3582.54 h33.46; Top Overlay "B15" at 3860,3331 h33.46 r30; Top Overlay "D9" at 3763,3351.38 h33.46; Top Overlay "D11" at 3664,3351.38 h33.46; Top Overlay "D13" at 3561,3351.38 h33.46; Top Overlay "D15" at 3458,3351.38 h33.46; Top Overlay "G3" at 3366,3351.38 h33.46; Top Overlay "G5" at 3267,3351 h33.46; Top Overlay "G7" at 3170,3351.38 h33.46; Top Overlay "C6" at 3071,3351.38 h33.46; Top Overlay "C8" at 2967,3351.38 h33.46; Top Overlay "A8" at 2870.85,3364.77 h33.46; Top Overlay "A10" at 2757,3360 h33.46; Top Overlay "A12" at 2654,3362 h33.46; Top Overlay "C10" at 2247.69,2902 h33.47 r90; Top Overlay "E6" at 2770,1757.39 h33.46; Top Overlay "X" at 2243,3104 h33.46 r90; Top Overlay "LQ-F103Z-SYS VI2" at 2782,2096 h62.99; Top Overlay "A0" at 3863,1757.39 h33.46; Top Overlay "A2" at 4175.94,1910 h33.46 r90; Top Overlay "E0" at 2471,1757.39 h33.46; Top Overlay "VRL" at 3758,1757.39 h33.46; Top Overlay "BAT" at 2851,1993.34 h33.46; Top Overlay "A11" at 2659,3582.54 h33.46; Top Overlay "D10" at 3656,3582.54 h33.46; Top Overlay "C11" at 2447,2919 h33.46; Top Overlay "A15" at 2459,3122 h33.47